# EAGLE board quad2 (EAGLE 7.4.0)

Size 89.73 x 46.41 mm. Coordinates in mm from the lower left corner, seen from the top.
Outline: 0,0 89.73,0 89.73,46.41 0,46.41 0,0
Copper layers (1*16): Top 0.035mm / dielectric 1.5mm / Bottom 0.035mm
Design rules "default": minimum track width 10mil, minimum drill 24mil, track to track 8mil, track to pad 8mil, pad to pad 8mil, via to via 8mil, smd to smd 8mil, copper to edge 40mil, drill to drill 8mil, minimum pad ring 10mil, minimum via ring 8mil, stop-mask expansion 4mil, vias tented up to drill 0mil, thermal gap 10mil

## Footprints (pad centres in the part's own frame; a part is rotated, then mirrored left to right if it is on the bottom)
FE08 = drill 0.813 long: 1 -8.89,0; 2 -6.35,0; 3 -3.81,0; 4 -1.27,0; 5 1.27,0; 6 3.81,0; 7 6.35,0; 8 8.89,0
FE05-1 = drill 0.813 long: 1 -5.08,0; 2 -2.54,0; 3 0,0; 4 2.54,0; 5 5.08,0
FE06 = drill 0.813 long: 1 -6.35,0; 2 -3.81,0; 3 -1.27,0; 4 1.27,0; 5 3.81,0; 6 6.35,0
ARDUINO_NANO2 = drill 0.914 pad 1.778 square: J1.1 -7.62,17.78 | drill 0.914 pad 1.778: J1.2 -7.62,15.24; J1.3 -7.62,12.7; J1.4 -7.62,10.16; J1.5 -7.62,7.62; J1.6 -7.62,5.08; J1.7 -7.62,2.54; J1.8 -7.62,0; J1.9 -7.62,-2.54; J1.10 -7.62,-5.08; J1.11 -7.62,-7.62; J1.12 -7.62,-10.16; J1.13 -7.62,-12.7; J1.14 -7.62,-15.24; J1.15 -7.62,-17.78; J2.1 7.62,17.78; J2.2 7.62,15.24; J2.3 7.62,12.7; J2.4 7.62,10.16; J2.5 7.62,7.62; J2.6 7.62,5.08; J2.7 7.62,2.54; J2.8 7.62,0; J2.9 7.62,-2.54; J2.10 7.62,-5.08; J2.11 7.62,-7.62; J2.12 7.62,-10.16; J2.13 7.62,-12.7; J2.14 7.62,-15.24; J2.15 7.62,-17.78 | hole 1.651: -7.62,-20.32; 7.62,-20.32; 7.62,20.32; -7.62,20.32
FE10 = drill 0.813 long: 1 -11.43,0; 2 -8.89,0; 3 -6.35,0; 4 -3.81,0; 5 -1.27,0; 6 1.27,0; 7 3.81,0; 8 6.35,0; 9 8.89,0; 10 11.43,0

## Placement (x,y rotation side)
GPS  [FE08]  39.5,4.8 180 top
HMC5883L  [FE05-1]  66.55,14.78 0 top
HV  [FE06]  6.2,9.53 90 top
LV  [FE06]  16.36,9.53 270 top
MODUL1  ARDUINO_NANO2  [ARDUINO_NANO2]  21.45,27.3 270 top
RECIEVER  [FE10]  84.71,22.86 270 top

## Library data of the parts
GPS HMC5883L HV LV RECIEVER = con-lsta; OC_FARNELL: unknown; OC_NEWARK: unknown
MODUL1 = arduino; ANZAHL: 2; MODUL: TRUE; STECKX0: -76200; STECKX1: 76200; STECKY0: 177800; STECKY1: 177800

## Nets
AREF: MODUL1.J2.13
COM: MODUL1.J1.4
N$1: MODUL1.J1.11 RECIEVER.1
N$2: GPS.5 HV.3 MODUL1.J2.4 RECIEVER.8
N$3: GPS.8 MODUL1.J1.13
N$4: GPS.7 MODUL1.J1.14
N$5: MODUL1.J1.5 RECIEVER.2
N$6: MODUL1.J1.12 RECIEVER.10
N$7: MODUL1.J1.6 RECIEVER.3
N$8: MODUL1.J1.7 RECIEVER.4
N$9: GPS.2 HMC5883L.4 HV.4 LV.3 MODUL1.J2.2 RECIEVER.9
N$10: GPS.3 LV.1
N$11: MODUL1.J1.8 RECIEVER.5
N$12: MODUL1.J1.9 RECIEVER.6
N$13: MODUL1.J1.10 RECIEVER.7
N$14: HMC5883L.5 LV.4 MODUL1.J2.14
N$15: HV.5 MODUL1.J2.5
N$16: HMC5883L.3 MODUL1.J2.7
N$17: HMC5883L.2 MODUL1.J2.8
N$18: HV.6 MODUL1.J2.6
N$19: GPS.4 LV.2
VIN: MODUL1.J2.1

## Tracks (layer width: path | path; a pad name or v marks a point on that pad's centre or on a via)
N$2  (3 unrouted)
N$9  (5 unrouted)
N$16  (1 unrouted)
N$17  (1 unrouted)
(copper drawn outside any net)
  shapes: Bottom circle x4